# Altium PCB pcb-ldc-front-connector-hw.PcbDoc
Units mm, origin at the board's own origin, x right, y up, seen from the top; angles counter-clockwise.
Board outline 30 x 25 mm, 2 copper layers (Top Layer, Bottom Layer), stack 1.58 mm thick; 5 components, 3 nets, 9 pads, 0 vias.
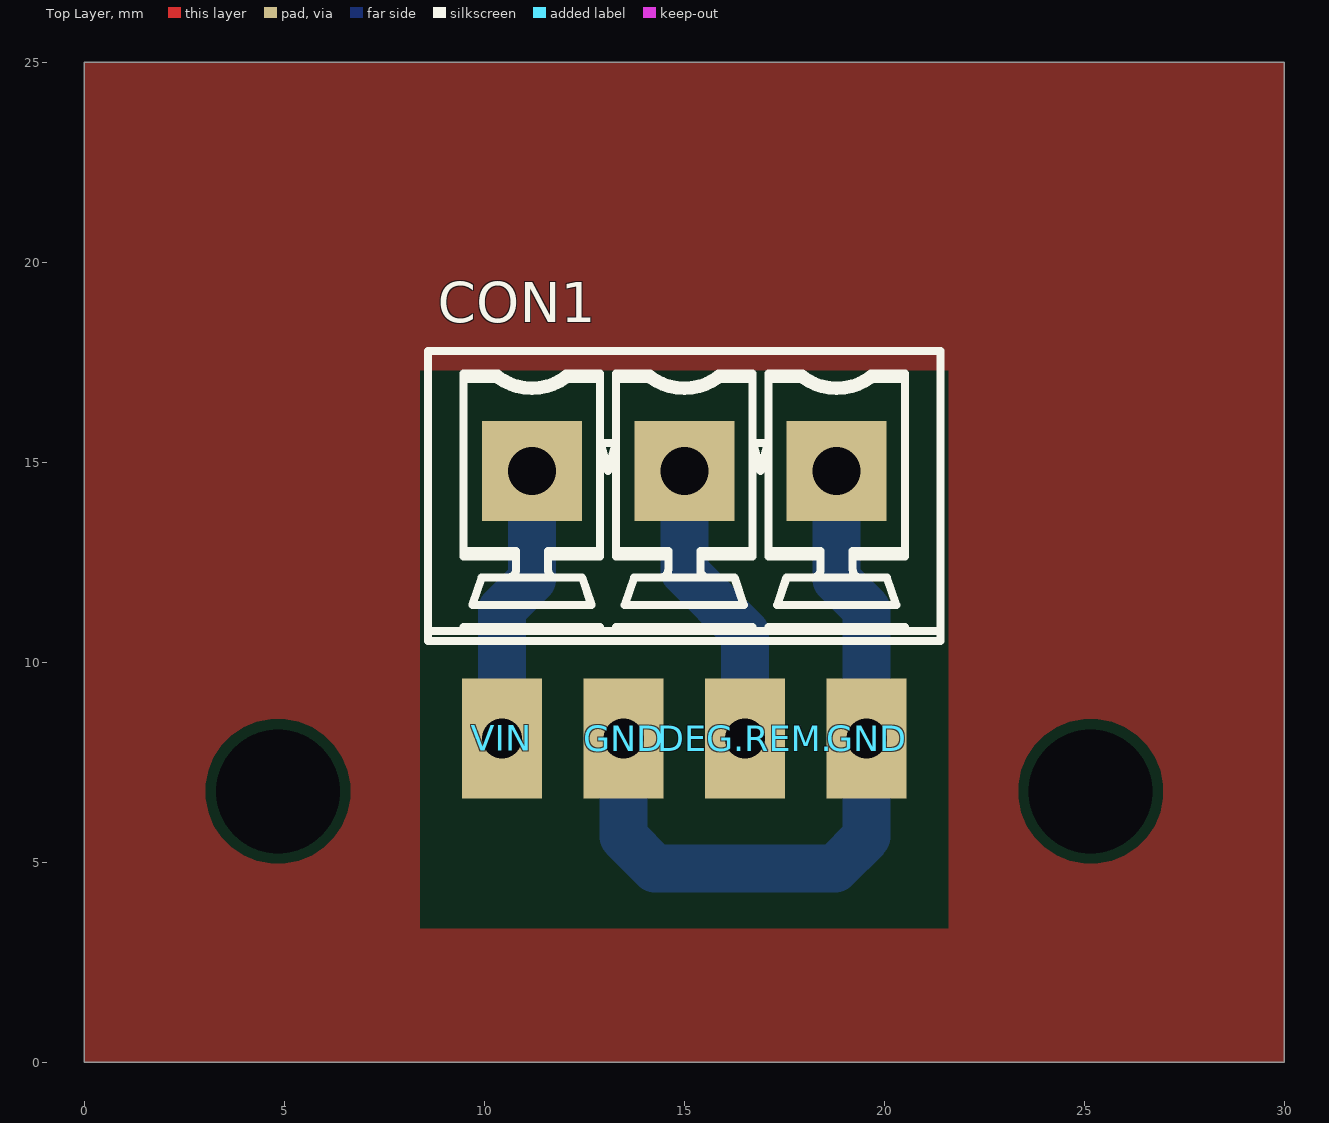
[diagram p0: Top Layer view]
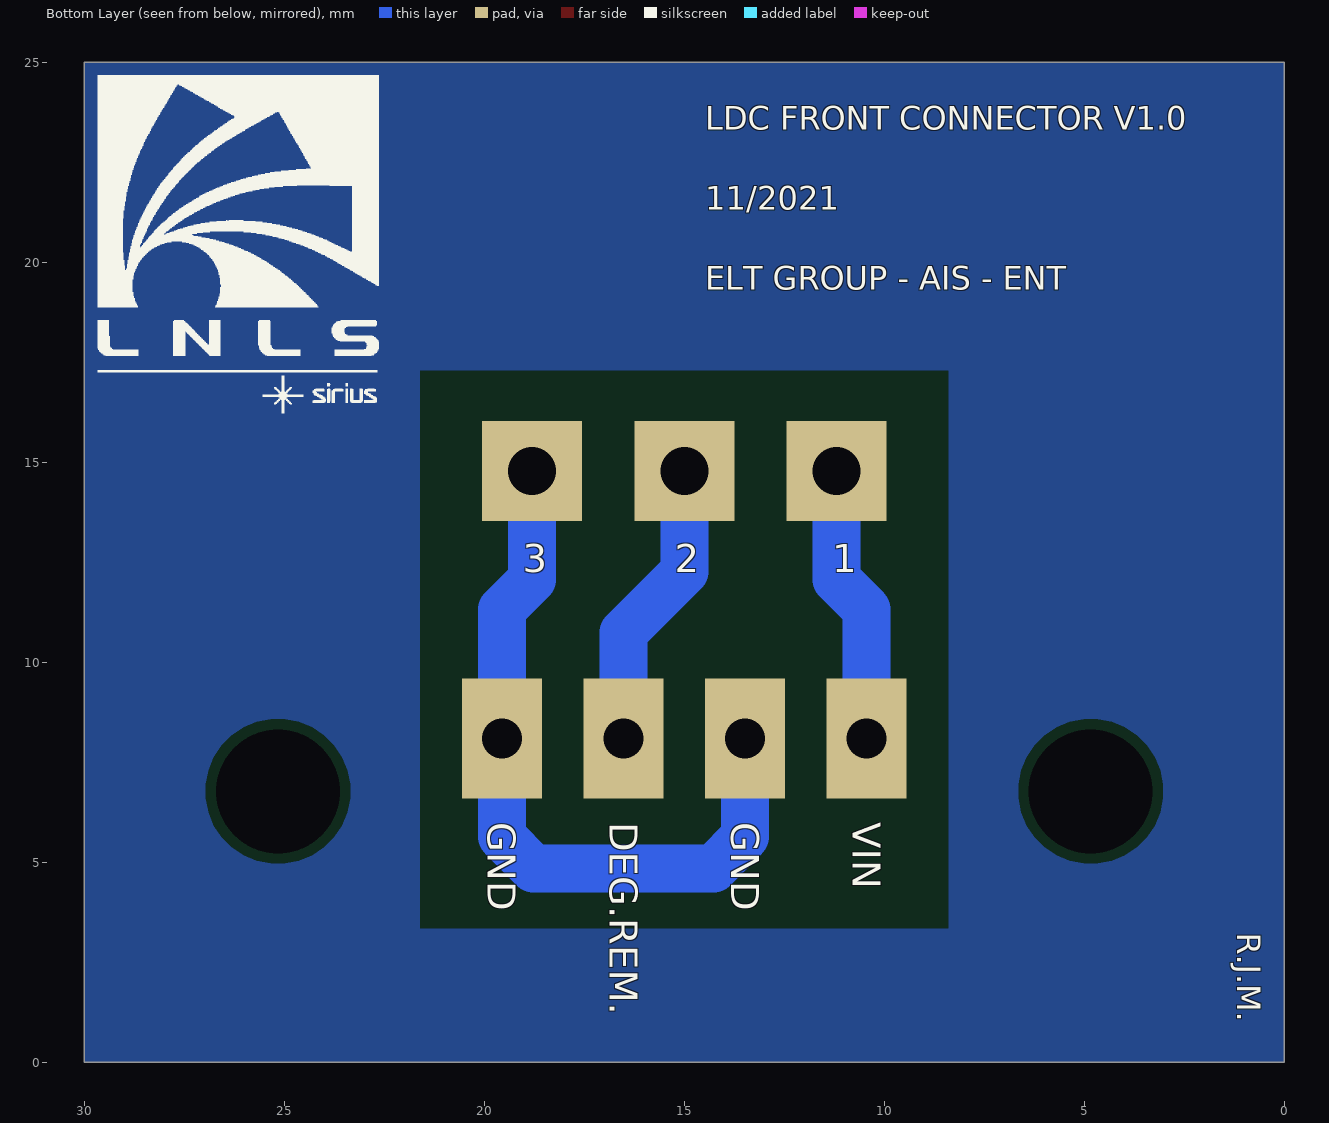
[diagram p1: Bottom Layer view, seen from below]

## Layer stack, top to bottom
Top Solder: solder mask 0.01, Solder Resist, Dk 3.5
Top Layer: signal copper 0.035
Dielectric 1: dielectric 1.51, FR-4, Dk 4.8
Bottom Layer: signal copper 0.035
Bottom Solder: solder mask 0.01, Solder Resist, Dk 3.5

## Board outline
0,0 0,25 30,25 30,0

## Design rules (kind name [scope] priority, off if disabled: settings)
Clearance [All] p1: gap=0.254 ignorepadtopadclearanceinfootprint=FALSE except(0: Arc-Hole Track-Hole SMDPad-Hole THPad-Hole Via-Hole Fill-Hole Poly-Hole Region-Hole Text-Hole)
HoleSize [All] p1: absolutevalues=TRUE maxlimit=4 minlimit=0.025 maxpercent=80.000 minpercent=20.000
PolygonConnect [All] p1: connectstyle=Relief reliefconductorwidth=0.254 reliefentries=4 polygonreliefangle="90 Angle" airgapwidth=0.254
RoutingVias [All] p1: holewidth=0.711 width=1.27 viastyle="Through Hole" minholewidth=0.711 minwidth=1.27 maxholewidth=0.711 maxwidth=1.27
ShortCircuit [All] p1: allowed=TRUE
SilkToSolderMaskClearance [IsPad] p1: minsilkscreentomaskgap=0.2 clearancetoexposedcopper=TRUE
SolderMaskExpansion [All] p1: expansion=0.102 istentingtop=FALSE
Width [All] p1: maxlimit=2 minlimit=0.254 preferedwidth=0.254
27 further rules are at their usual default settings.

## Classes and differential pairs
component class circuit-ldc-front-connector-hw: CON1 DEG.REM. GND VIN

## Components (designator, comment, footprint, x,y, rotation, side; value= is the part's Value field where it differs from the comment)
CON1 "Connector 3 Male" PHOENIX_1803439 15,14.785 r180 top locked
DEG.REM. "WIRE HOLE" "WIRE HOLE"#1 11.71,-4.75 r0 top (schematic designator WH2)
GND "WIRE HOLE" "WIRE HOLE"#2 24.98,-5.13 r0 top (schematic designator WH4)
GND "WIRE HOLE" "WIRE HOLE"#3 19.43,-5.29 r0 top (schematic designator WH3)
VIN "WIRE HOLE" "WIRE HOLE"#4 4.53,-4.75 r0 top (schematic designator WH1)

## Footprints (in the part's own frame and the unit in brackets; to place one, negate y for a bottom-side part, rotate by r counter-clockwise, add the part's x,y. Pads: shape width x height; smd on the part's side, far side on the other; paste and mask are expansions set on the pad)
PHOENIX_1803439 [mm]
  rect 2.5x2.5 hole 1.2: 1(3.81,0) 2(0,0) 3(-3.81,0)
  silkscreen extent -6.41,-3 6.41,4.25, body extent -6.41,-3 6.41,4.25, height 9.2
"WIRE HOLE"#1 [mm]
  rect 2x3 hole 1: 1(4.81,12.85)
"WIRE HOLE"#2 [mm]
  rect 2x3 hole 1: 1(-5.42,13.23)
"WIRE HOLE"#3 [mm]
  rect 2x3 hole 1: 1(-5.95,13.39)
"WIRE HOLE"#4 [mm]
  rect 2x3 hole 1: 1(5.91,12.85)

## Part data
CON1: "Header; 8 A; 160 V; 3.81; 3; Soldering; 1.2 mm; 2.5 kV; 160/250 V; PBT", Color=Green, Current=8A, Flammability Rating="UL94 V-0", Manufacturer="Phoenix Contact", Manufacturer Part Number=1803439, Package Quantity=50, Supplier Part Number 1=277-1222-ND, Voltage=300V, Voltage Rating=160V, Voltage Rating (DC)=640mV, Approvals=UL,CSA,VDE,cULus,CB,EAC, Category="Terminal Blocks", ComponentLink1Description=https://datasheet.ciiva.com/795/1803439-795431.pdf?src-supplier=Digi-Key, ComponentLink1URL=https://datasheet.ciiva.com/795/1803439-795431.pdf?src-supplier=Digi-Key, ComponentLink2Description=https://datasheet.ciiva.com/16096/1803439-16096878.pdf?src-supplier=Onlinecomponents.com, ComponentLink2URL=https://datasheet.ciiva.com/16096/1803439-16096878.pdf?src-supplier=Onlinecomponents.com, ComponentLink3Description=https://datasheet.ciiva.com/7630/1697151-7630851.pdf?src-supplier=Element14, ComponentLink3URL=https://datasheet.ciiva.com/7630/1697151-7630851.pdf?src-supplier=Element14, ComponentLink4Description=https://datasheet.ciiva.com/15197/getdatasheetpartid-176372-15197467.pdf?src-supplier=Verical, ComponentLink4URL=https://datasheet.ciiva.com/15197/getdatasheetpartid-176372-15197467.pdf?src-supplier=Verical, ComponentLink5Description=https://datasheet.ciiva.com/29211/740304-da-01-de-leiterplattenstecker-mcv-1-5-3-g-3-81-29211972.pdf?src-supplier=Conrad, ComponentLink5URL=https://datasheet.ciiva.com/29211/740304-da-01-de-leiterplattenstecker-mcv-1-5-3-g-3-81-29211972.pdf?src-supplier=Conrad, Connector Type=Plug, Contact Material=Tin, Contact Plating=Tin, Current Rating=8A, Código LNLS=AP108375, Depth=7.25mm, Gender=Male, Height=12.6mm, Housing Color=Green, Housing Material=Polybutylene, Lead Free="Lead Free", Length=12.82mm, Max Current Rating=8A, Mount="Through Hole", Number of Contacts=3, Number of Levels=1, Number of Poles=3, Number of Positions=3, Number of Positions Per Level=3, Number of Rows=1, Orientation=Straight, Packaging=Bulk, Pitch=3.81mm, Pricing 1="1=1,32000, 10=1,26500, 50=1,21000, 100=1,17700, 250=1,10000, 500=1,01200, 1000=0,93500, 2500=0,89100, 5000=0,84700 (USD)", REACH SVHC="No SVHC", RoHS=Yes, RoHS Compliant=Yes, Series=MCV, Stock 1=13222, Supplier 1=Digi-Key, Termination=Solder, Weight=4oz, Width=12.82mm

## Free pads (board coordinates)
  round 0 hole 3.1 unplated: 5(4.84,6.775) 6(25.16,6.775)

## Nets (pads, with @x,y where several pads share a name; then routed paths per layer and width w, separated by ;. In a path a pad name is that pad's centre, name@x,y a point inside that pad or via, vN(x,y) a via of type N, cw(c..) or ccw(c..) an arc to the next point about the centre after c; other vN are vias at no path point)
NetCON1_1: CON1.1 VIN.1 | length 7
  Bottom Layer w1.2: VIN.1 10.44,11.32 11.19,12.07 CON1.1
NetCON1_2: CON1.2 DEG.REM..1 | length 7.3
  Bottom Layer w1.2: CON1.2 15,12.27 16.52,10.75 DEG.REM..1
NetCON1_3: CON1.3 GND.1 | length 18.7
  Bottom Layer w1.2: GND.1@13.48,8.1 13.48,5.64 14.27,4.85 18.77,4.85 19.56,5.64 19.56,8.1 19.56,11.32 18.81,12.07 CON1.3

## Polygon pours and split planes (outlines as drawn)
no net on Bottom Layer "NONET_L02_P000" (solid, pour order 0): 0,25 30,25 30,0 0,0
no net on Top Layer "NONET_L01_P001" (solid, pour order 1): 0,25 30,25 30,0 0,0

## Other copper
Top Layer:
  pour cut-out: 8.4,17.285 8.4,3.35 21.6,3.35 21.6,17.285
Bottom Layer:
  pour cut-out: 8.4,17.285 21.6,17.285 21.6,3.35 8.4,3.35

## Silkscreen, mask and mechanical layers (free items; w line width, h text height)
Bottom Overlay:
  drawing of 1469 lines, arcs and shapes, not listed
  text "LDC FRONT CONNECTOR V1.0 /  / 11/2021 /  / ELT GROUP - AIS - ENT" at 14.476,19.117 h1
  text "R.J.M." at 1.374,3.233 h1 r90
Mechanical 1:
  the board outline again, w0.254

## Text inside footprints (layer, text, board x,y; h text height)
CON1: Bottom Overlay "1" at 11.307,12.25 h0.7; Bottom Overlay "2" at 15.233,12.25 h0.7; Bottom Overlay "3" at 19.043,12.25 h0.7; Mechanical 14 "CON?" at 8.744,18.604 h1
DEG.REM.: Mechanical 14 "WH?" at 16.004,5.996 h1 r270
GND: Mechanical 14 "WH?" at 19.104,5.966 h1 r270
GND: Mechanical 14 "WH?" at 13.044,6.016 h1 r270
VIN: Mechanical 14 "WH?" at 9.894,5.996 h1 r270